# Altium PCB Macropad V2.PcbDoc (part 2 of 2)
Units mil, origin at the board's own origin, x right, y up, seen from the top; angles counter-clockwise.
Board outline 4300 x 6330 mil, 2 copper layers (Top Layer, Bottom Layer); 118 components, 85 nets, 479 pads, 180 vias.
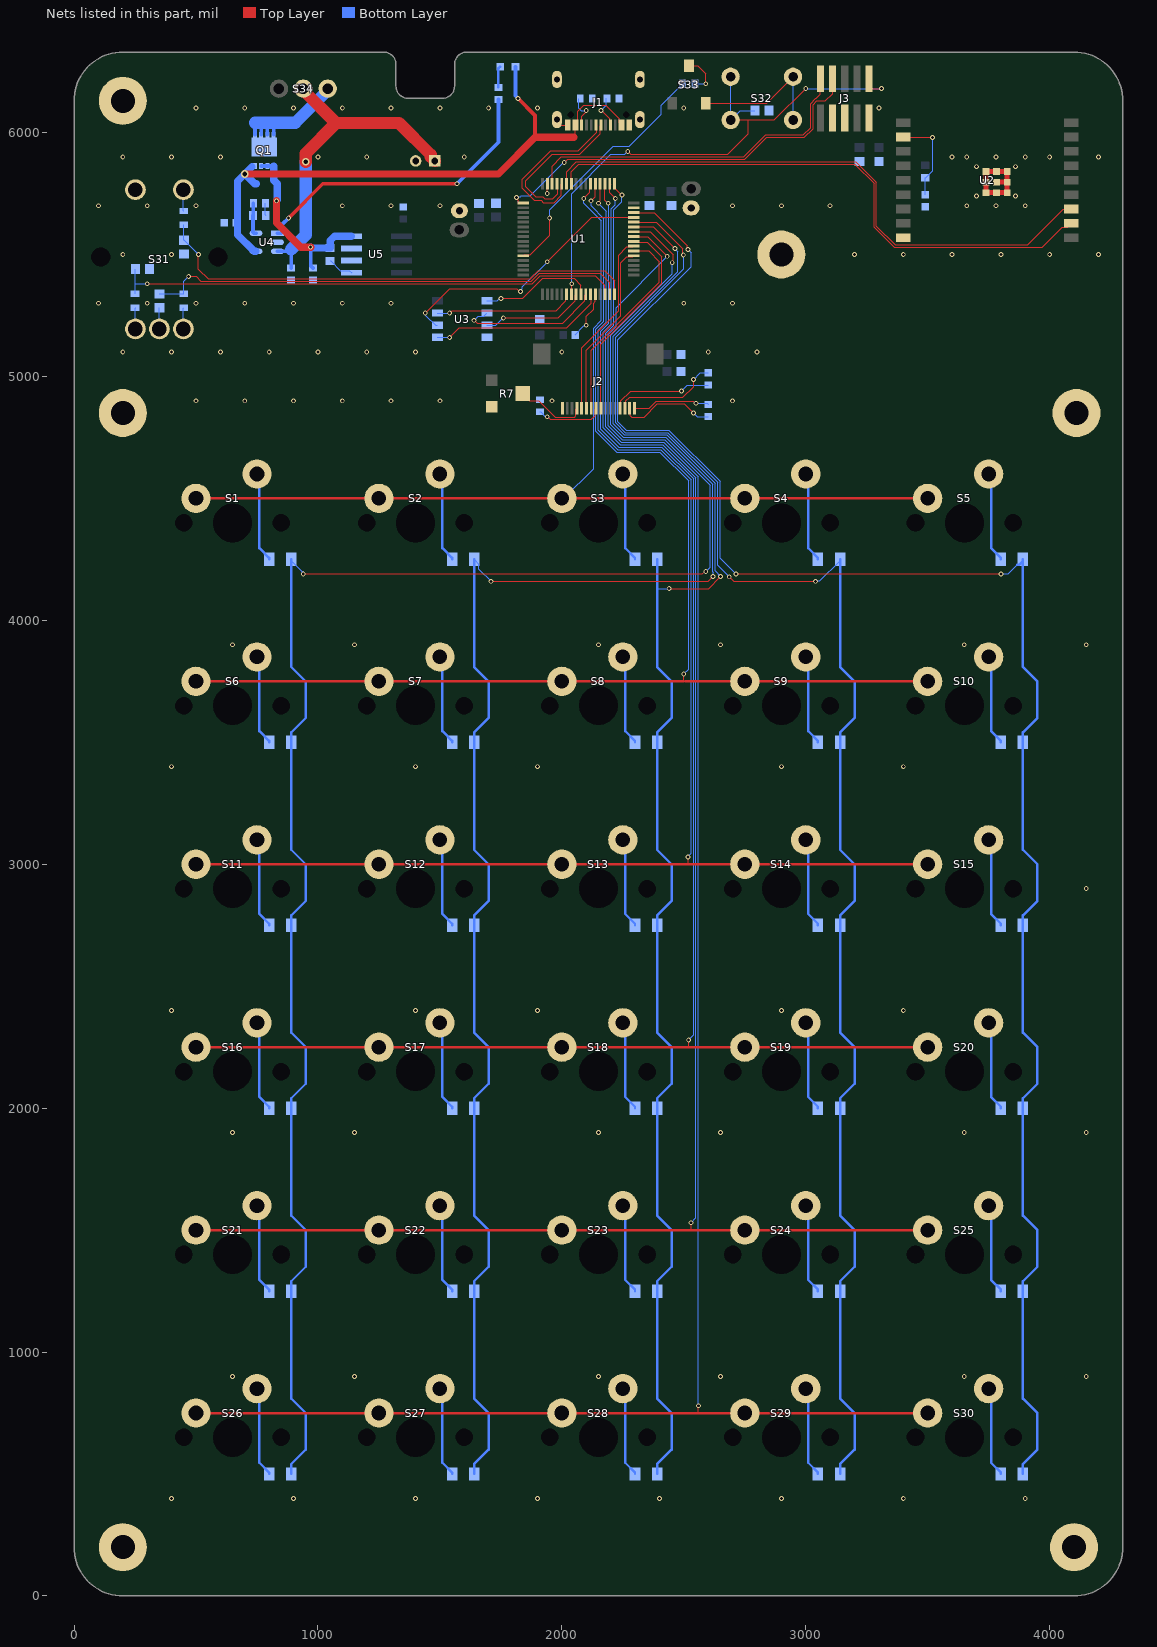
[diagram p2: the nets of this part, all layers, seen from the top]

## Via types
v1: diameter 19.68, hole 11.81, Top Layer to Bottom Layer, 175 vias
v2: diameter 31.5, hole 19.68, Top Layer to Bottom Layer, 5 vias

## Nets (pads, with @x,y where several pads share a name; then routed paths per layer and width w, separated by ;. In a path a pad name is that pad's centre, name@x,y a point inside that pad or via, vN(x,y) a via of type N, cw(c..) or ccw(c..) an arc to the next point about the centre after c; other vN are vias at no path point) (continued)
GND: C1.1 C2.1 C3.0 C4.2 C5.2 C6.1 C7.1 C8.0 C9.2 C10.2 C11.1 C14.2 C15.2 C16.1 C17.1 C18.1 C19.2 C20.1 C21.1 C22.2 C23.2 J1.A1/B12 J1.B1/A12 J1.MNT1 J1.MNT2 J1.MNT3 J1.MNT4 J2.16 J3.3 J3.5 J3.9 J4.2 PTH1.1 PTH2.1 PTH3.1 PTH4.1 PTH5.1 PTH6.1 R4.2 R5.2 R6.1 R7.3 R11.2 R12.2 S31.0 S31.C S32.2 S32.4 S33.3 U1.12 U1.31 U1.47 U2.9 U2.19 U3.4 U4.2 U5.6 U5.7 | length 1410.3
  Top Layer w5: v1(1940,5750) 1940.32,5750.31 1940.32,5789.69 U1.47@1940.63,5790 ; J1.MNT4@1979.92,6053.07 1979.92,6046.62 1995.8,6030.75 2004.39,6030.75 2004.7,6030.43 J1.B1/A12@2024.02,6030.43 ; v1(2100,5210) 2100,5246.31 2130,5276.31 2130,5300.06 2137.48,5307.54 U1.12@2137.48,5337.24 ; S33.3@2590,6120 2839.37,6120 S32.2@2947.95,6228.58
  Top Layer w20: U2.19@3782.28,5796.69 U2.19@3825.59,5796.69 ; U2.19@3825.59,5796.69 U2.19@3825.59,5840 U2.19@3782.28,5840 U2.19@3738.98,5840 U2.19@3738.98,5796.69 U2.19@3738.98,5753.39 U2.19@3825.59,5753.39 U2.19@3825.59,5796.69
  Bottom Layer w5: S31.C@350,5194.72 350,5281.3 C11.1@350.16,5281.46 ; R12.2@784.61,5710 784.61,5661.97 R11.2@786.57,5660 ; C4.2@2054.68,5170 2054.68,5171.06 2090.81,5207.19 2097.19,5207.19 v1(2100,5210) ; S32.4@2947.95,6051.42 S32.2@2947.95,6228.58
  other v1: 400,400 900,400 1400,400 1900,400 2400,400 2900,400 3400,400 3900,400 650,900 1150,900 2150,900 2650,900 3650,900 4150,900 650,1900 1150,1900 2150,1900 2650,1900 3650,1900 4150,1900 400,2400 1400,2400 1900,2400 2900,2400 3400,2400 4150,2900 400,3400 1400,3400 1900,3400 2900,3400 3400,3400 650,3900 1150,3900 2150,3900 2650,3900 3650,3900 4150,3900 500,4900 700,4900 900,4900 1100,4900 1300,4900 1500,4900 1960,4900 2700,4900 200,5100 400,5100 600,5100 800,5100 1000,5100 1200,5100 1400,5100 2000,5100 2600,5100 2800,5100 100,5300 300,5300 500,5300 700,5300 900,5300 1100,5300 1300,5300 2500,5300 2700,5300 200,5500 400,5500 3200,5500 3400,5500 3600,5500 3800,5500 4000,5500 4200,5500 100,5700 300,5700 500,5700 1100,5700 1300,5700 1500,5700 2700,5700 2900,5700 3100,5700 3660,5700 3780,5700 3900,5700 3700,5740 3860,5740 3700,5860 3860,5860 200,5900 400,5900 600,5900 1000,5900 1200,5900 1600,5900 3600,5900 3660,5900 3780,5900 3900,5900 4000,5900 4200,5900 500,6100 700,6100 900,6100 1100,6100 1300,6100 1500,6100 1700,6100 1900,6100 2500,6100 3300,6100
NetC9_1: C9.1 R1.2 U1.16 | length 2015.7
  Top Layer w5: v1(510,5500) 510,5440 550,5400 1813.99,5400 1814.29,5399.71 1870.12,5399.71 1876.2,5405.78 1902.76,5432.34 2175.94,5432.34 2216.22,5392.06 U1.16@2216.22,5337.24
  Bottom Layer w5: C9.1@450.16,5558.54 C9.1@451.14,5558.54 ; R1.2@450.16,5621.46 450.16,5559.53 C9.1@451.14,5558.54 ; v1(510,5500) 510,5500.67 452.13,5558.54 C9.1@451.14,5558.54
NetC10_1: C10.1 R2.1 U1.14 | length 2092.5
  Top Layer w5: v1(300,5380) 1805.71,5380 1806,5379.71 1878.41,5379.71 1896.2,5397.5 1911.04,5412.34 2137.66,5412.34 2176.85,5373.15 U1.14@2176.85,5337.24
  Bottom Layer w5: R2.1@250.16,5338.54 250.16,5370 ; 251.61,5370 251.61,5380 ; C10.1@251.61,5440 251.61,5380 ; v1(300,5380) 251.61,5380
NetC11_2: C11.2 R3.1 U1.15 | length 1990.5
  Top Layer w5: v1(470,5410) 500.29,5410 520.29,5390 1809.85,5390 1810.14,5389.71 1874.27,5389.71 1886.2,5401.64 1906.9,5422.34 2157.66,5422.34 2196.53,5383.47 U1.15@2196.53,5337.24
  Bottom Layer w5: C11.2@350.16,5338.54 R3.1@450.16,5338.54 450.16,5390.16 v1(470,5410)
NetC12_1: C12.1 J2.1 | length 319.7
  Top Layer w5: J2.1@2297.64,4869.41 2358.99,4869.41 2387.83,4898.25 2537.78,4898.25 2546.03,4890 v1(2550,4890)
  Bottom Layer w5: v1(2550,4890) 2595.22,4890 C12.1@2600,4885.22
NetC12_2: C12.2 J2.2 | length 397.3
  Top Layer w5: J2.2@2277.95,4869.41 2281.36,4866.01 2281.36,4839.52 2287.44,4833.45 2337.17,4833.45 2391.97,4888.25 2501.75,4888.25 v1(2540,4850)
  Bottom Layer w5: v1(2540,4850) 2555.22,4834.78 C12.2@2600,4834.78
NetC13_1: C13.1 J2.3 | length 434.5
  Top Layer w5: J2.3@2258.27,4869.41 2261.67,4872.82 2261.67,4899.3 2277.4,4915.02 2496.62,4915.02 2540,4958.4 v1(2540,4987.12)
  Bottom Layer w5: v1(2540,4987.12) 2568.09,5015.22 C13.1@2600,5015.22
NetC13_2: C13.2 J2.4 | length 416.4
  Top Layer w5: J2.4@2238.58,4869.41 2241.99,4872.82 2241.99,4899.3 2282.69,4940 v1(2490,4940)
  Bottom Layer w5: v1(2490,4940) 2514.78,4964.78 C13.2@2600,4964.78
NetC18_2: C18.2 R8.1 U2.2 | length 369.7
  Top Layer w5: U2.2@3400,5981.73 3401.73,5980 v1(3520,5980)
  Bottom Layer w5: C18.2@3490,5744.68 R8.1@3490,5814.38 3492.08,5814.38 3520,5842.3 v1(3520,5980)
NetC19_1: C19.1 J3.10 S32.1 S32.3 U1.7 | length 2353.4
  Top Layer w5: U1.7@2039.05,5337.24 2039.9,5338.09 2039.9,5379.15 v1(2040.75,5380) ; v1(2270,5922.34) 2282.34,5910 2680,5910 2764.38,5994.38 2764.38,6051.42 ; S32.3@2692.05,6051.42 2764.38,6051.42 ; v1(3000,6180) 2871.42,6051.42 2764.38,6051.42 ; J3.10@3260,6220.12 3260,6192.07 3272.07,6180 v1(3310,6180)
  Bottom Layer w5: v1(2040.75,5380) 2040,5380.75 2040,5750 2200,5910 2257.66,5910 v1(2270,5922.34) ; S32.1@2692.05,6228.58 S32.3@2692.05,6051.42 2730.63,6090 C19.1@2791.46,6090 ; v1(3000,6180) v1(3310,6180)
NetC23_1: C23.1 D32.1 Q1.1 Q1.2 Q1.3 R13.2 U5.8 | length 769.9
  Top Layer w30: v1(830,5720) 830,5630 930,5530 v1(970,5530)
  Bottom Layer w15: Q1.3@767.2,5862.52 Q1.2@792.8,5862.52 Q1.1@818.39,5862.52 ; v1(970,5530) 970,5454.68 971.51,5453.17 971.51,5452.11 978.94,5444.68 C23.1@980,5444.68
  Bottom Layer w30: Q1.1@818.39,5862.52 818.39,5804.92 D32.1@833.31,5790 833.31,5723.31 v1(830,5720) ; v1(970,5530) 973.43,5526.57 R13.2@1050,5526.57 1050,5557.43 1067.57,5575 U5.8@1137.64,5575
NetD1_1: D1.1 D6.1 D11.1 D16.1 D21.1 D26.1 U1.25 | length 7577.6
  Top Layer w5: v1(940,4190) 2576.03,4190 2586.03,4200 v1(2590,4200) ; U1.25@2294.96,5573.46 2351.22,5573.46 v1(2432.34,5492.34)
  Bottom Layer w5: D1.1@890.55,4244.09 v1@938.15,4196.5 ; v1(2432.34,5492.34) 2222.5,5282.5 2222.5,5205.83 2190,5173.33 2190,4798.28 2248.28,4740 2422.43,4740 2608.51,4553.92 2608.51,4218.51 v1(2590,4200)
  Bottom Layer w10: D26.1@890.55,500 890.55,540.55 950,600 950,750 890.55,809.45 D21.1@890.55,1250 890.55,1290.55 950,1350 950,1500 890.55,1559.45 D16.1@890.55,2000 890.55,2040.55 950,2100 950,2250 890.55,2309.45 D11.1@890.55,2750 890.55,2790.55 950,2850 950,3000 890.55,3059.45 D6.1@890.55,3500 890.55,3540.55 950,3600 950,3750 890.55,3809.45 D1.1@890.55,4250 D1.1@890.55,4244.09 ; v1@938.15,4196.5 938.15,4191.85 v1(940,4190)
NetD1_2: D1.2 S1.1 | length 370.7
  Bottom Layer w10: S1.1@750,4600 760,4590 760,4295.91 800,4255.91 D1.2@800,4250
NetD2_1: D2.1 D7.1 D12.1 D17.1 D22.1 D27.1 U1.26 | length 6936
  Top Layer w5: v1(1710,4160) 2600,4160 v1(2620,4180) ; U1.26@2294.96,5593.15 2363.13,5593.15 2457.03,5499.25 2457.03,5474.7 2452.73,5470.4 v1(2452.73,5466.43)
  Bottom Layer w5: D2.1@1640.55,4250 1659.7,4230.85 1659.7,4210.3 v1(1710,4160) ; v1(2452.73,5466.43) 2452.73,5421.92 2200,5169.19 2200,4802.43 2252.43,4750 2426.57,4750 2618.51,4558.06 2618.51,4198.95 2620,4197.45 v1(2620,4180)
  Bottom Layer w10: D27.1@1640.55,500 1640.55,540.55 1700,600 1700,750 1640.55,809.45 D22.1@1640.55,1250 1640.55,1290.55 1700,1350 1700,1500 1640.55,1559.45 D17.1@1640.55,2000 1640.55,2040.55 1700,2100 1700,2250 1640.55,2309.45 D12.1@1640.55,2750 1640.55,2790.55 1700,2850 1700,3000 1640.55,3059.45 D7.1@1640.55,3500 1640.55,3540.55 1700,3600 1700,3750 1640.55,3809.45 D2.1@1640.55,4250
NetD2_2: D2.2 S2.1 | length 370.7
  Bottom Layer w10: S2.1@1500,4600 1510,4590 1510,4295.91 1550,4255.91 D2.2@1550,4250
NetD3_1: D3.1 D8.1 D13.1 D18.1 D23.1 D28.1 U1.27 | length 6225.8
  Top Layer w5: U1.27@2294.96,5612.83 2375.04,5612.83 v1(2463.94,5523.94) ; v1(2440,4130) 2601.6,4130 2650,4178.4 v1(2650,4180)
  Bottom Layer w5: 2390.55,4130 v1(2440,4130) ; v1(2463.94,5523.94) 2463.94,5521.68 2475.08,5510.55 2475.08,5430.12 2210,5165.04 2210,4806.57 2256.57,4760 2430.71,4760 2628.51,4562.2 2628.51,4203.09 2650,4181.6 v1(2650,4180)
  Bottom Layer w10: D28.1@2390.55,500 2390.55,540.55 2450,600 2450,750 2390.55,809.45 D23.1@2390.55,1250 2390.55,1290.55 2450,1350 2450,1500 2390.55,1559.45 D18.1@2390.55,2000 2390.55,2040.55 2450,2100 2450,2250 2390.55,2309.45 D13.1@2390.55,2750 2390.55,2790.55 2450,2850 2450,3000 2390.55,3059.45 D8.1@2390.55,3500 2390.55,3540.55 2450,3600 2450,3750 2390.55,3809.45 D3.1@2390.55,4250
NetD3_2: D3.2 S3.1 | length 370.7
  Bottom Layer w10: S3.1@2250,4600 2260,4590 2260,4295.91 2300,4255.91 D3.2@2300,4250
NetD4_1: D4.1 D9.1 D14.1 D19.1 D24.1 D29.1 U1.28 | length 6503
  Top Layer w5: U1.28@2294.96,5632.52 2386.96,5632.52 2495.32,5524.16 2495.32,5500.44 v1(2498.01,5497.75) ; v1(2686.2,4178.38) 2704.58,4160 v1(3040,4160)
  Bottom Layer w5: v1(2498.01,5497.75) 2500,5495.76 2500,5440.9 2220,5160.9 2220,4810.71 2260.71,4770 2434.85,4770 2638.51,4566.34 2638.51,4226.07 v1(2686.2,4178.38) ; v1@3041.85,4161.85 3058.31,4161.85 D4.1@3140.55,4244.09
  Bottom Layer w10: v1(3040,4160) v1@3041.85,4161.85 ; D29.1@3140.55,500 3140.55,540.55 3200,600 3200,750 3140.55,809.45 D24.1@3140.55,1250 3140.55,1290.55 3200,1350 3200,1500 3140.55,1559.45 D19.1@3140.55,2000 3140.55,2040.55 3200,2100 3200,2250 3140.55,2309.45 D14.1@3140.55,2750 3140.55,2790.55 3200,2850 3200,3000 3140.55,3059.45 D9.1@3140.55,3500 3140.55,3540.55 3200,3600 3200,3750 3140.55,3809.45 D4.1@3140.55,4250 D4.1@3140.55,4244.09
NetD4_2: D4.2 S4.1 | length 370.7
  Bottom Layer w10: S4.1@3000,4600 3010,4590 3010,4295.91 3050,4255.91 D4.2@3050,4250
NetD5_1: D5.1 D10.1 D15.1 D20.1 D25.1 D30.1 U1.30 | length 7259.6
  Top Layer w5: U1.30@2294.96,5671.89 2378.11,5671.89 2514.85,5535.15 2514.85,5522.81 v1(2517.66,5520) ; v1@2710,4190 v1(2713.52,4190) v1(3800,4190)
  Bottom Layer w5: v1(2517.66,5520) 2530,5507.66 2530,5450 2230,5150 2230,4814.85 2264.85,4780 2438.99,4780 2648.51,4570.49 2648.51,4255.01 v1(2713.52,4190) ; v1(3800,4190) 3830.55,4190 3867.99,4227.44
  Bottom Layer w10: 3867.99,4227.44 3873.9,4227.44 3890.55,4244.09 D5.1@3890.55,4250 3890.55,3809.45 3950,3750 3950,3600 3890.55,3540.55 D10.1@3890.55,3500 3890.55,3059.45 3950,3000 3950,2850 3890.55,2790.55 D15.1@3890.55,2750 3890.55,2309.45 3950,2250 3950,2100 3890.55,2040.55 D20.1@3890.55,2000 3890.55,1559.45 3950,1500 3950,1350 3890.55,1290.55 D25.1@3890.55,1250 3890.55,809.45 3950,750 3950,600 3890.55,540.55 D30.1@3890.55,500
NetD5_2: D5.2 S5.1 | length 370.7
  Bottom Layer w10: S5.1@3750,4600 3760,4590 3760,4295.91 3800,4255.91 D5.2@3800,4250
NetD6_2: D6.2 S6.1 | length 370.7
  Bottom Layer w10: S6.1@750,3850 760,3840 760,3545.91 800,3505.91 D6.2@800,3500
NetD7_2: D7.2 S7.1 | length 370.7
  Bottom Layer w10: S7.1@1500,3850 1510,3840 1510,3545.91 1550,3505.91 D7.2@1550,3500
NetD8_2: D8.2 S8.1 | length 370.7
  Bottom Layer w10: S8.1@2250,3850 2260,3840 2260,3545.91 2300,3505.91 D8.2@2300,3500
NetD9_2: D9.2 S9.1 | length 370.7
  Bottom Layer w10: S9.1@3000,3850 3010,3840 3010,3545.91 3050,3505.91 D9.2@3050,3500
NetD10_2: D10.2 S10.1 | length 370.7
  Bottom Layer w10: S10.1@3750,3850 3760,3840 3760,3545.91 3800,3505.91 D10.2@3800,3500
NetD11_2: D11.2 S11.1 | length 370.7
  Bottom Layer w10: S11.1@750,3100 760,3090 760,2795.91 800,2755.91 D11.2@800,2750
NetD12_2: D12.2 S12.1 | length 378.8
  Bottom Layer w10: S12.1@1500,3091.93 S12.1@1500,3100 1510,3090 1510,2795.91 1550,2755.91 D12.2@1550,2750
NetD13_2: D13.2 S13.1 | length 370.7
  Bottom Layer w10: S13.1@2250,3100 2260,3090 2260,2795.91 2300,2755.91 D13.2@2300,2750
NetD14_2: D14.2 S14.1 | length 370.7
  Bottom Layer w10: S14.1@3000,3100 3010,3090 3010,2795.91 3050,2755.91 D14.2@3050,2750
NetD15_2: D15.2 S15.1 | length 370.7
  Bottom Layer w10: S15.1@3750,3100 3760,3090 3760,2795.91 3800,2755.91 D15.2@3800,2750
NetD16_2: D16.2 S16.1 | length 370.7
  Bottom Layer w10: S16.1@750,2350 760,2340 760,2045.91 800,2005.91 D16.2@800,2000
NetD17_2: D17.2 S17.1 | length 370.7
  Bottom Layer w10: S17.1@1500,2350 1510,2340 1510,2045.91 1550,2005.91 D17.2@1550,2000
NetD18_2: D18.2 S18.1 | length 370.7
  Bottom Layer w10: S18.1@2250,2350 2260,2340 2260,2045.91 2300,2005.91 D18.2@2300,2000
NetD19_2: D19.2 S19.1 | length 370.7
  Bottom Layer w10: S19.1@3000,2350 3010,2340 3010,2045.91 3050,2005.91 D19.2@3050,2000
NetD20_2: D20.2 S20.1 | length 370.7
  Bottom Layer w10: S20.1@3750,2350 3760,2340 3760,2045.91 3800,2005.91 D20.2@3800,2000
NetD21_2: D21.2 S21.1 | length 370.7
  Bottom Layer w10: S21.1@750,1600 760,1590 760,1295.91 800,1255.91 D21.2@800,1250
NetD22_2: D22.2 S22.1 | length 370.7
  Bottom Layer w10: S22.1@1500,1600 1510,1590 1510,1295.91 1550,1255.91 D22.2@1550,1250
NetD23_2: D23.2 S23.1 | length 370.7
  Bottom Layer w10: S23.1@2250,1600 2260,1590 2260,1295.91 2300,1255.91 D23.2@2300,1250
NetD24_2: D24.2 S24.1 | length 370.7
  Bottom Layer w10: S24.1@3000,1600 3010,1590 3010,1295.91 3050,1255.91 D24.2@3050,1250
NetD25_2: D25.2 S25.1 | length 370.7
  Bottom Layer w10: S25.1@3750,1600 3760,1590 3760,1295.91 3800,1255.91 D25.2@3800,1250
NetD26_2: D26.2 S26.1 | length 370.7
  Bottom Layer w10: S26.1@750,850 760,840 760,545.91 800,505.91 D26.2@800,500
NetD27_2: D27.2 S27.1 | length 370.7
  Bottom Layer w10: S27.1@1500,850 1510,840 1510,545.91 1550,505.91 D27.2@1550,500
NetD28_2: D28.2 S28.1 | length 370.7
  Bottom Layer w10: S28.1@2250,850 2260,840 2260,545.91 2300,505.91 D28.2@2300,500
NetD29_2: D29.2 S29.1 | length 370.7
  Bottom Layer w10: S29.1@3000,850 3010,840 3010,545.91 3050,505.91 D29.2@3050,500
NetD30_2: D30.2 S30.1 | length 370.7
  Bottom Layer w10: S30.1@3750,850 3760,840 3760,545.91 3800,505.91 D30.2@3800,500
NetD31_1: D31.1 R10.1 | length 88.3
  Bottom Layer w10: R10.1@1740,6184.61 1740,6262.99 D31.1@1747.01,6270
NetJ1_A5: J1.A5 R4.1 | length 136.6
  Top Layer w5: v1(2160,6090) 2163.18,6090 2195.81,6057.37 2195.81,6033.84 J1.A5@2199.21,6030.43
  Bottom Layer w5: v1(2160,6090) 2181.46,6111.46 R4.1@2181.46,6140
NetJ1_B5: J1.B5 R5.1 | length 140.1
  Top Layer w5: J1.B5@2081.1,6030.43 2081.1,6067.13 2100,6086.03 v1(2100,6090)
  Bottom Layer w5: R5.1@2070,6138.54 2070,6100 2080,6090 v1(2100,6090)
NetJ2_8: J2.8 U1.24 | length 865.7
  Top Layer w5: J2.8@2159.84,4869.41 2159.84,5132.14 2410,5382.3 2410,5490 2349.63,5550.37 2298.37,5550.37 U1.24@2294.96,5553.78
NetJ2_9: J2.9 R6.2 | length 277.9
  Top Layer w5: v1(1940,4834.84) 1941.73,4834.84 1953.13,4823.45 2120.68,4823.45 2136.75,4839.52 2136.75,4866.01 J2.9@2140.16,4869.41
  Bottom Layer w5: R6.2@1910,4855.39 1912.95,4855.39 1930.69,4837.65 1937.19,4837.65 v1(1940,4834.84)
NetJ2_10: J2.10 U1.22 | length 839.8
  Top Layer w5: J2.10@2120.47,4869.41 2120.47,5106.91 2400,5386.44 2400,5470 2355.59,5514.41 U1.22@2294.96,5514.41
NetJ2_11: J2.11 U1.21 | length 720.1
  Top Layer w5: J2.11@2100.79,4869.41 2100.79,5107.08 2242.5,5248.79 2242.5,5466.78 2267.04,5491.32 2291.55,5491.32 U1.21@2294.96,5494.72
NetJ2_12: J2.12 U1.23 | length 767.6
  Top Layer w5: J2.12@2081.1,4869.41 2081.1,5116.92 2232.5,5268.32 2232.5,5496.15 2267.04,5530.69 2291.55,5530.69 U1.23@2294.96,5534.09
NetJ2_13: J2.13 R7.2 | length 293
  Top Layer w5: R7.2@1840,4930 1840,4928.03 1867.03,4901 1905.44,4901 1972.99,4833.45 2051.93,4833.45 2058.01,4839.52 2058.01,4866.01 J2.13@2061.42,4869.41
NetJ3_2: J3.2 U1.46 | length 1414.1
  Top Layer w5: U1.46@1960.32,5790 1960.32,5861.91 1998.4,5900 2745.86,5900 2836.3,5990.44 2990.44,5990.44 3020,6020 3020,6118.18 3041.82,6140 3042.3,6140 3060,6157.7 J3.2@3060,6220.12
NetJ3_4: J3.4 U1.49 | length 1635
  Top Layer w5: v1(1813.89,5733.89) 1813.89,5730.54 1821.08,5723.35 1821.08,5714.67 1824.49,5711.26 U1.49@1842.2,5711.26 ; v1(2010,5877.66) 2011.63,5877.66 2023.97,5890 2750,5890 2840.44,5980.44 2994.58,5980.44 3030,6015.86 3030,6114.04 3045.96,6130 3080,6130 3110,6160 J3.4@3110,6220.12
  Bottom Layer w5: v1(1813.89,5733.89) 1816.7,5736.7 1830.74,5736.7 1834.04,5740 1870,5740 2007.66,5877.66 v1(2010,5877.66)
NetQ1_5: Q1.5 Q1.6 Q1.7 Q1.8 Q1.9 S34.1 | length 569.4
  Bottom Layer w5: 767.2,6037.84 769.37,6040 792.8,6016.57 ; 817.53,6040 818.39,6039.14
  Bottom Layer w15: Q1.5@741.61,5990.48 741.61,6040 ; Q1.6@767.2,5990.48 767.2,6037.84 ; Q1.7@792.8,5990.48 792.8,6016.57 ; Q1.8@818.39,5990.48 818.39,6039.14
  Bottom Layer w50: 741.61,6040 769.37,6040 792.8,6040 817.53,6040 906.76,6040 1040,6173.24 S34.1@1040,6180
NetR1_1: R1.1 S31.1 | length 87.8
  Bottom Layer w5: S31.1@448.43,5765.59 448.43,5680.28 R1.1@450.16,5678.54
NetR2_2: R2.2 S31.A | length 87.3
  Bottom Layer w5: R2.2@250.16,5281.46 251.57,5280.04 S31.A@251.57,5194.72
NetR3_2: R3.2 S31.B | length 87.4
  Bottom Layer w5: S31.B@448.43,5194.72 448.43,5279.72 R3.2@450.16,5281.46
NetR9_1: R9.1 U1.60 | length 1028.5
  Top Layer w5: U1.60@1842.2,5494.72 1845.61,5498.13 1870.12,5498.13 1950,5578.01 v1(1950,5650)
  Bottom Layer w5: v1(1950,5650) 1950,5683.55 2211.14,5944.69 2277.19,5944.69 2408.32,6075.81 2408.32,6111.86 2494.38,6197.92 R9.1@2494.38,6200
NetR9_2: R9.2 S33.2 | length 167.2
  Top Layer w5: S33.2@2521.1,6273.54 2556.46,6273.54 2590,6240 v1(2590,6200)
  Bottom Layer w5: R9.2@2545.62,6200 v1(2590,6200)
NetR10_2: R10.2 U4.1 | length 1254.2
  Top Layer w15: v1(880,5650) 1020,5790 v1(1570,5790)
  Bottom Layer w15: U4.1@833.95,5587.4 848.91,5587.4 852.79,5591.28 852.79,5622.79 v1(880,5650) ; v1(1570,5790) 1740,5960 R10.2@1740,6135.39
NetR11_1: R11.1 R12.1 U4.5 | length 133.9
  Bottom Layer w15: R12.1@735.39,5710 734.41,5709.02 734.41,5660.98 R11.1@733.43,5660 733.43,5590.98 737.01,5587.4 U4.5@746.05,5587.4
NetR13_1: R13.1 U5.5 | length 107.7
  Bottom Layer w5: R13.1@1050,5473.43 1052.95,5473.43 1092.07,5434.31 1128.33,5434.31 U5.5@1137.64,5425
NetS1_0: S1.0 S2.0 S3.0 S4.0 S5.0 U1.38 | length 4403.9
  Top Layer w5: v1(2090,5730) 2114.9,5754.9 2114.9,5787.11 U1.38@2117.8,5790
  Top Layer w10: S1.0@500,4500 S2.0@1250,4500 S3.0@2000,4500 S4.0@2750,4500 S5.0@3500,4500
  Bottom Layer w5: S3.0@2000,4500 2008.53,4500 2130,4621.47 2130,5198.18 2162.5,5230.68 2162.5,5637.5 2090,5710 v1(2090,5730)
NetS6_0: S6.0 S7.0 S8.0 S9.0 S10.0 U1.37 | length 5351.3
  Top Layer w5: v1(2120,5720) 2137.48,5737.48 U1.37@2137.48,5790 ; v1(2500,3780) 2500,3750 2507.66,3750
  Top Layer w10: S6.0@500,3750 S7.0@1250,3750 S8.0@2000,3750 2500,3750 ; 2507.66,3750 S9.0@2750,3750 S10.0@3500,3750
  Bottom Layer w5: v1(2120,5720) 2120,5700 2172.5,5647.5 2172.5,5226.54 2140,5194.04 2140,4775.55 2225.55,4690 2401.72,4690 2520,4571.72 2520,3800 v1(2500,3780)
NetS11_0: S11.0 S12.0 S13.0 S14.0 S15.0 U1.36 | length 6086.6
  Top Layer w5: v1(2150,5710) 2150,5713.97 2157.16,5721.14 U1.36@2157.16,5790 ; v1(2517.66,3030) 2517.66,3012.66 2517.74,3012.58 2517.74,3002.26 2520,3000
  Top Layer w10: S11.0@500,3000 S12.0@1250,3000 S13.0@2000,3000 2517.66,3000 S14.0@2750,3000 S15.0@3500,3000
  Bottom Layer w5: v1(2150,5710) 2182.5,5677.5 2182.5,5222.4 2150,5189.9 2150,4779.69 2229.69,4700 2405.86,4700 2530,4575.86 2530,3045.72 2517.66,3033.38 v1(2517.66,3030)
NetS16_0: S16.0 S17.0 S18.0 S19.0 S20.0 U1.35 | length 6828.8
  Top Layer w5: U1.35@2176.85,5790 2176.85,5723.15 v1(2190,5710) ; 2520,2250 v1(2520,2280)
  Top Layer w10: S16.0@500,2250 S17.0@1250,2250 S18.0@2000,2250 2520,2250 S19.0@2750,2250 S20.0@3500,2250
  Bottom Layer w5: v1(2190,5710) 2192.5,5707.5 2192.5,5218.25 2160,5185.75 2160,4783.83 2233.83,4710 2410,4710 2540,4580 2540,2300 v1(2520,2280)
NetS21_0: S21.0 S22.0 S23.0 S24.0 S25.0 U1.34 | length 7590.3
  Top Layer w5: U1.34@2196.53,5790 2199.94,5786.59 2196.53,5783.19 2196.53,5753.47 2219.2,5730.8 v1(2219.2,5729.2) ; 2530,1500 v1(2530,1530)
  Top Layer w10: S21.0@500,1500 S22.0@1250,1500 S23.0@2000,1500 2530,1500 S24.0@2750,1500 S25.0@3500,1500
  Bottom Layer w5: v1(2219.2,5729.2) 2219.2,5703.34 2202.5,5686.64 2202.5,5214.11 2170,5181.61 2170,4790 2240,4720 2414.14,4720 2550,4584.14 2550,1550 v1(2530,1530)
NetS26_0: S26.0 S27.0 S28.0 S29.0 S30.0 U1.33 | length 8430.3
  Top Layer w5: U1.33@2216.22,5790 2216.22,5772.28 2245.23,5743.28 v1(2246.55,5743.28) ; 2360,750 2450,750 ; 2560,750 v1(2560,780)
  Top Layer w10: S26.0@500,750 S27.0@1250,750 S28.0@2000,750 2360,750 2450,750 2560,750 S29.0@2750,750 S30.0@3500,750
  Bottom Layer w5: v1(2246.55,5743.28) 2246.55,5716.55 2212.5,5682.5 2212.5,5209.97 2180,5177.47 2180,4794.14 2244.14,4730 2418.28,4730 2560,4588.28 v1(2560,780)
NetU1_6: U1.6 U3.7 | length 575.7
  Top Layer w5: v1(1540,5260) 1540.27,5260 1550.27,5270 1976.64,5270 2015.96,5309.33 2015.96,5333.84 U1.6@2019.37,5337.24
  Bottom Layer w5: U3.7@1490,5260 v1(1540,5260)
NetU1_8: U1.8 U3.3 | length 433.3
  Top Layer w5: v1(1760,5240) 1986.01,5240 2055.33,5309.33 2055.33,5333.84 U1.8@2058.74,5337.24
  Bottom Layer w5: U3.3@1692.5,5210 1730,5210 v1(1760,5240)
NetU1_9: U1.9 U3.1 | length 472.6
  Top Layer w5: v1(1750,5320) 1840,5320 1922.34,5402.34 2050,5402.34 2078.43,5373.92 U1.9@2078.43,5337.24
  Bottom Layer w5: U3.1@1692.5,5310 1736.03,5310 1746.03,5320 v1(1750,5320)
NetU1_10: U1.10 U3.2 | length 592
  Top Layer w5: v1(1640,5230) 1652.34,5217.66 2003.04,5217.66 2094.7,5309.33 2094.7,5333.84 U1.10@2098.11,5337.24
  Bottom Layer w5: v1(1640,5230) 1657.5,5247.5 1680,5247.5 U3.2@1692.5,5260
NetU1_11: U1.11 U3.5 | length 726.1
  Top Layer w5: v1(1540,5160) 1580,5200 2020,5200 2120,5300 2120,5335.04 U1.11@2117.8,5337.24
  Bottom Layer w5: U3.5@1490,5160 v1(1540,5160)
NetU1_29: U1.29 U3.6 | length 1110
  Top Layer w5: v1(1440,5260) 1540,5360 1814.28,5360 1826.62,5347.66 v1(1830,5347.66) ; v1(1940,5470) 2122.2,5652.2 U1.29@2294.96,5652.2
  Bottom Layer w5: v1(1440,5260) 1442.81,5257.19 1442.81,5249.69 1482.5,5210 U3.6@1490,5210 ; v1(1830,5347.66) 1830,5351.63 1838.52,5360.15 1838.52,5367.2 1940,5468.68 v1(1940,5470)
NetU1_42: U1.42 U2.11 | length 2397.9
  Top Layer w5: U1.42@2039.05,5790 2039.05,5839.06 2070,5870 3201.72,5870 3280,5791.72 3280,5612.29 3362.03,5530.26 3970.26,5530.26 4052.18,5612.18 4073.76,5612.18 U2.11@4088.98,5627.4
NetU1_43: U1.43 U2.12 | length 2442.2
  Top Layer w5: U1.43@2019.37,5790 2019.37,5839.37 2060,5880 3205.86,5880 3290,5795.86 3290,5616.43 3366.18,5540.26 3910.26,5540.26 4054.88,5684.88 4087.4,5684.88 U2.12@4088.98,5686.46
USB_N: J1.A7 U1.44 | length 698.7
  Top Layer w5: U1.44@1999.68,5790 1997.34,5787.66 1997.34,5741.93 1968.07,5712.66 1924.53,5712.66 1914.85,5722.34 1886.5,5722.34 1836.75,5772.09 1836.75,5807.91 1953.84,5925 2067.2,5925 2142.5,6000.3 2142.5,6028.09 J1.A7@2140.16,6030.43
USB_P: J1.A6 U1.45 | length 649
  Top Layer w5: U1.45@1980,5790 1982.34,5787.66 1982.34,5748.14 1961.86,5727.66 1930.75,5727.66 1921.06,5737.34 1892.71,5737.34 1851.75,5778.3 1851.75,5801.7 1960.05,5910 2073.42,5910 2157.5,5994.08 2157.5,6028.09 J1.A6@2159.84,6030.43
VBAT: C21.2 J4.1 S34.2 U4.3 | length 1400.7
  Top Layer w50: S34.2@940,6180 940,6173.24 1074.48,6038.76 ; v2(950,5880) 950,5914.28 1074.48,6038.76 ; J4.1@1479.37,5883.54 1462.24,5900.67 1462.24,5909.06 1332.55,6038.76 1074.48,6038.76
  Bottom Layer w15: U4.3@833.95,5512.6 882.6,5512.6 890,5520 C21.2@890,5444.68
  Bottom Layer w50: 890,5520 950,5580 v2(950,5880)
VUSB: C20.2 D31.2 D32.2 J1.A4/B9 J1.B4/A9 Q1.4 U4.4 | length 2570.9
  Top Layer w5: 2050,5980 2055.51,5985.51 J1.B4/A9@2055.51,6030.43 2055.51,6045.51 2060,6050 2064.25,6050 2064.82,6050.57 2064.82,6086.42 2090.75,6112.34 2180.2,6112.34 2235.18,6057.37 2235.18,6039.74 J1.A4/B9@2244.49,6030.43
  Top Layer w15: v1(1820,6140) 1890,6070 1890,5980
  Top Layer w30: v2(700,5830) 1740,5830 1890,5980 2050,5980
  Bottom Layer w15: C20.2@664.68,5630 664.68,5628.94 672.11,5621.51 673.17,5621.51 C20.2@674.68,5620 ; D31.2@1810,6270 1810,6151.27 1820,6141.27 v1(1820,6140)
  Bottom Layer w30: v2@700.4,5830 740.4,5790 D32.2@746.69,5790 ; 730,5860 v2(700,5830) 700,5829.6 670,5799.6 670,5580.93 738.33,5512.6 U4.4@746.05,5512.6
pads on no net: J1.32 J1.33 J1.A8 J1.B6 J1.B7 J1.B8 J2.6 J2.GND J3.6 J3.7 J3.8 R7.1 S1.3 S1.4 S1.5 S2.3 S2.4 S2.5 S3.3 S3.4 S3.5 S4.3 S4.4 S4.5 S5.3 S5.4 S5.5 S6.3 S6.4 S6.5 S7.3 S7.4 S7.5 S8.3 S8.4 S8.5 S9.3 S9.4 S9.5 S10.3 S10.4 S10.5 S11.3 S11.4 S11.5 S12.3 S12.4 S12.5 S13.3 S13.4 S13.5 S14.3 S14.4 S14.5 S15.3 S15.4 S15.5 S16.3 S16.4 S16.5 S17.3 S17.4 S17.5 S18.3 S18.4 S18.5 S19.3 S19.4 S19.5 S20.3 S20.4 S20.5 S21.3 S21.4 S21.5 S22.3 S22.4 S22.5 S23.3 S23.4 S23.5 S24.3 S24.4 S24.5 S25.3 S25.4 S25.5 S26.3 S26.4 S26.5 S27.3 S27.4 S27.5 S28.3 S28.4 S28.5 S29.3 S29.4 S29.5 S30.3 S30.4 S30.5 S31.7 S34.3 U1.1 U1.2 U1.3 U1.4 U1.5 U1.17 U1.18 U1.19 U1.20 U1.39 U1.40 U1.41 U1.50 U1.51 U1.52 U1.53 U1.54 U1.55 U1.56 U1.57 U1.58 U1.59 U1.61 U1.62 U1.63 U1.64 U2.3 U2.4 U2.5 U2.6 U2.7 U2.8 U2.10 U2.13 U2.14 U2.15 U2.16 U2.17 U2.18 U5.2 U5.3 U5.4

## Polygon pours and split planes (outlines as drawn)
GND on Top Layer "NONET_L01_P000" (solid, shelved, pour order 0): 0,-10 0,6330 4300,6340 4300,0
GND on Bottom Layer "NONET_L02_P001" (solid, shelved, pour order 1): 0,0 0,6330 4300,6330 4300,0

## Silkscreen, mask and mechanical layers (free items; w line width, h text height)
Top Overlay:
  text "Macropad V2" at 2870,5153.32 h100
  text "Designed by Ben Veghte" at 2870,5056.66 h50
Board Outline:
  the board outline again, w10

## Text inside footprints (layer, text, board x,y; h text height)
S31: Mechanical 15 "R=20mm" at 260,6210 h40; Mechanical 15 "R=15mm" at 260,6095 h40; Mechanical 15 "R=12mm" at 260,5980 h40; Mechanical 15 "R=10mm" at 260,5895 h40